# Altium PCB pcb_gr15.PcbDoc
Units mm, origin at the board's own origin, x right, y up, seen from the top; angles counter-clockwise.
Board outline 107.99 x 87.08 mm, 2 copper layers (Top Layer, Bottom Layer); 27 components, 17 nets, 63 pads, 0 vias.
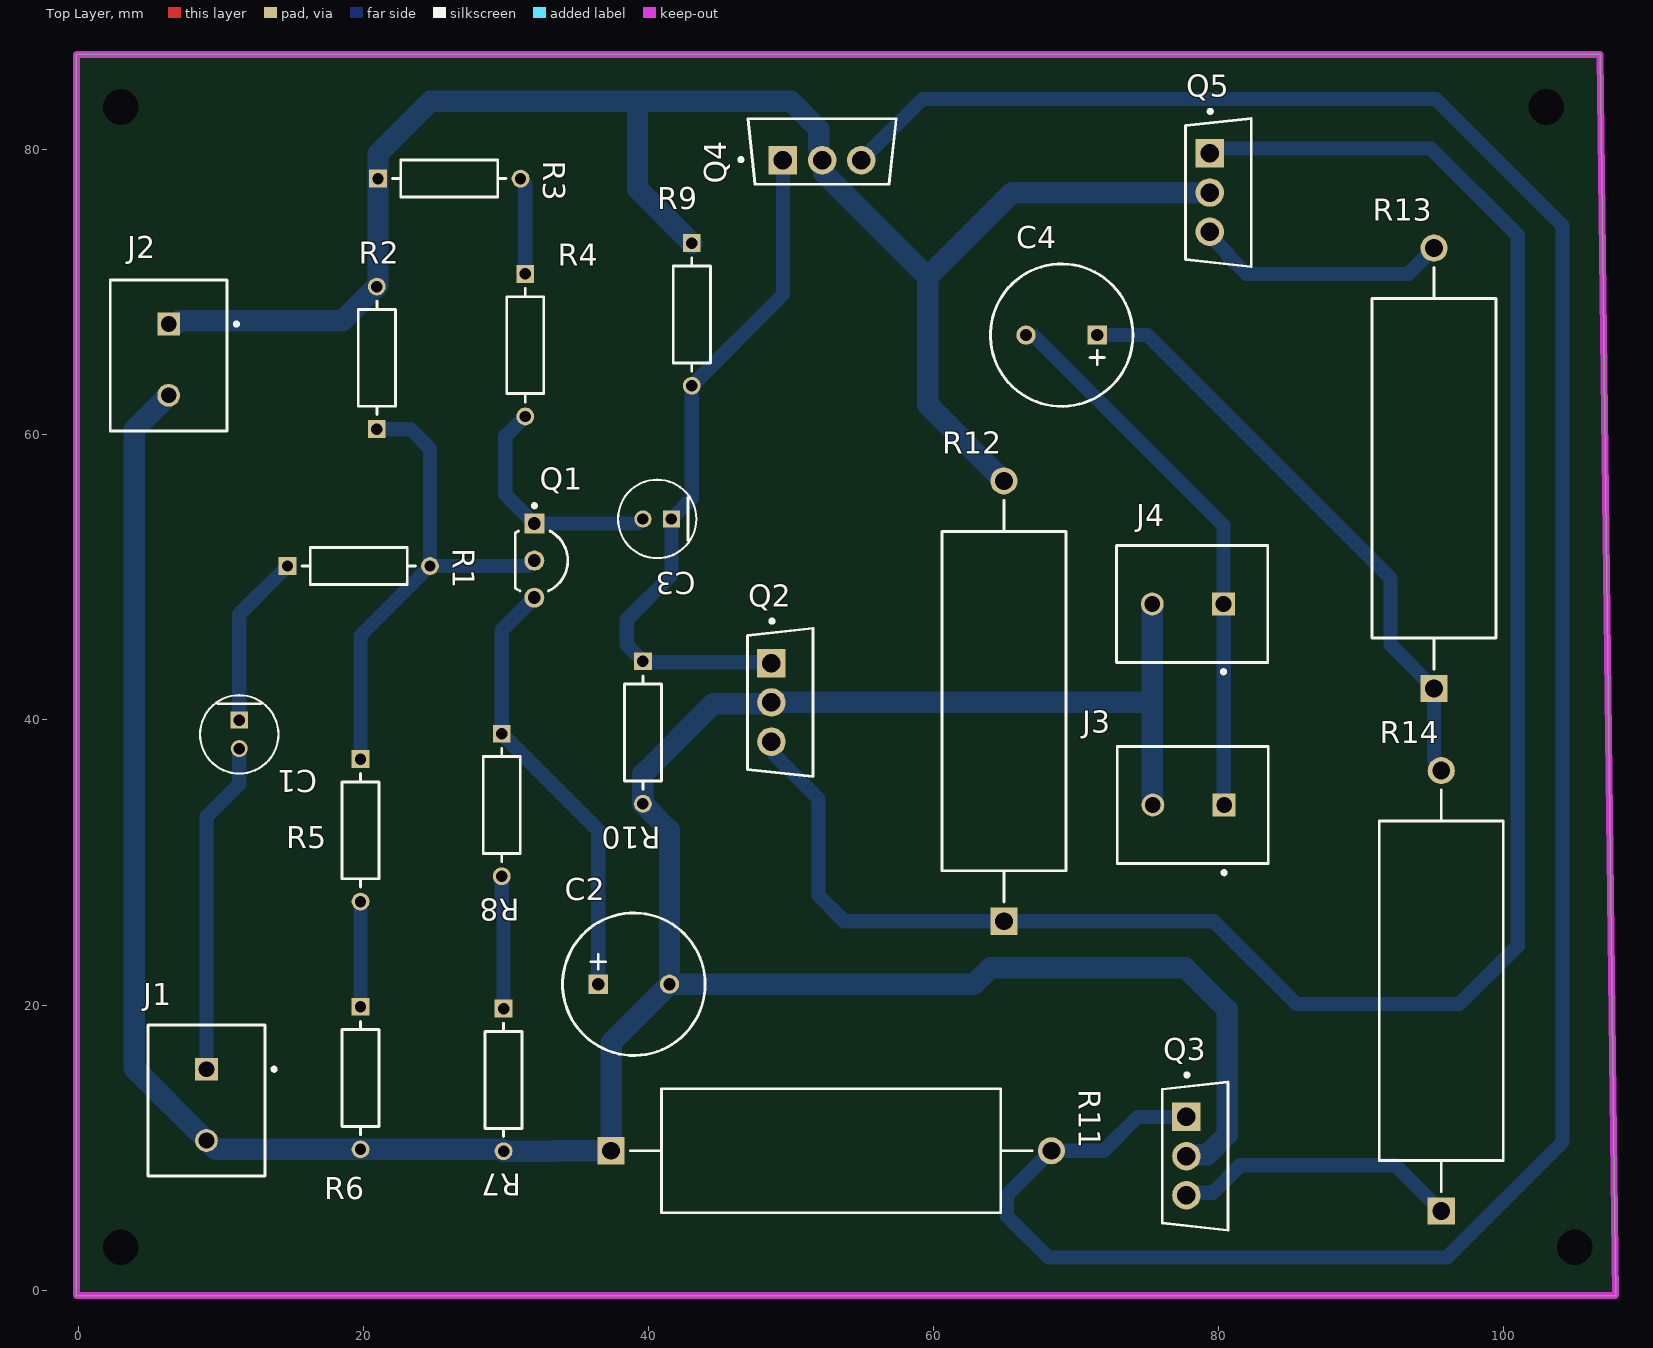
[diagram p0: Top Layer view]
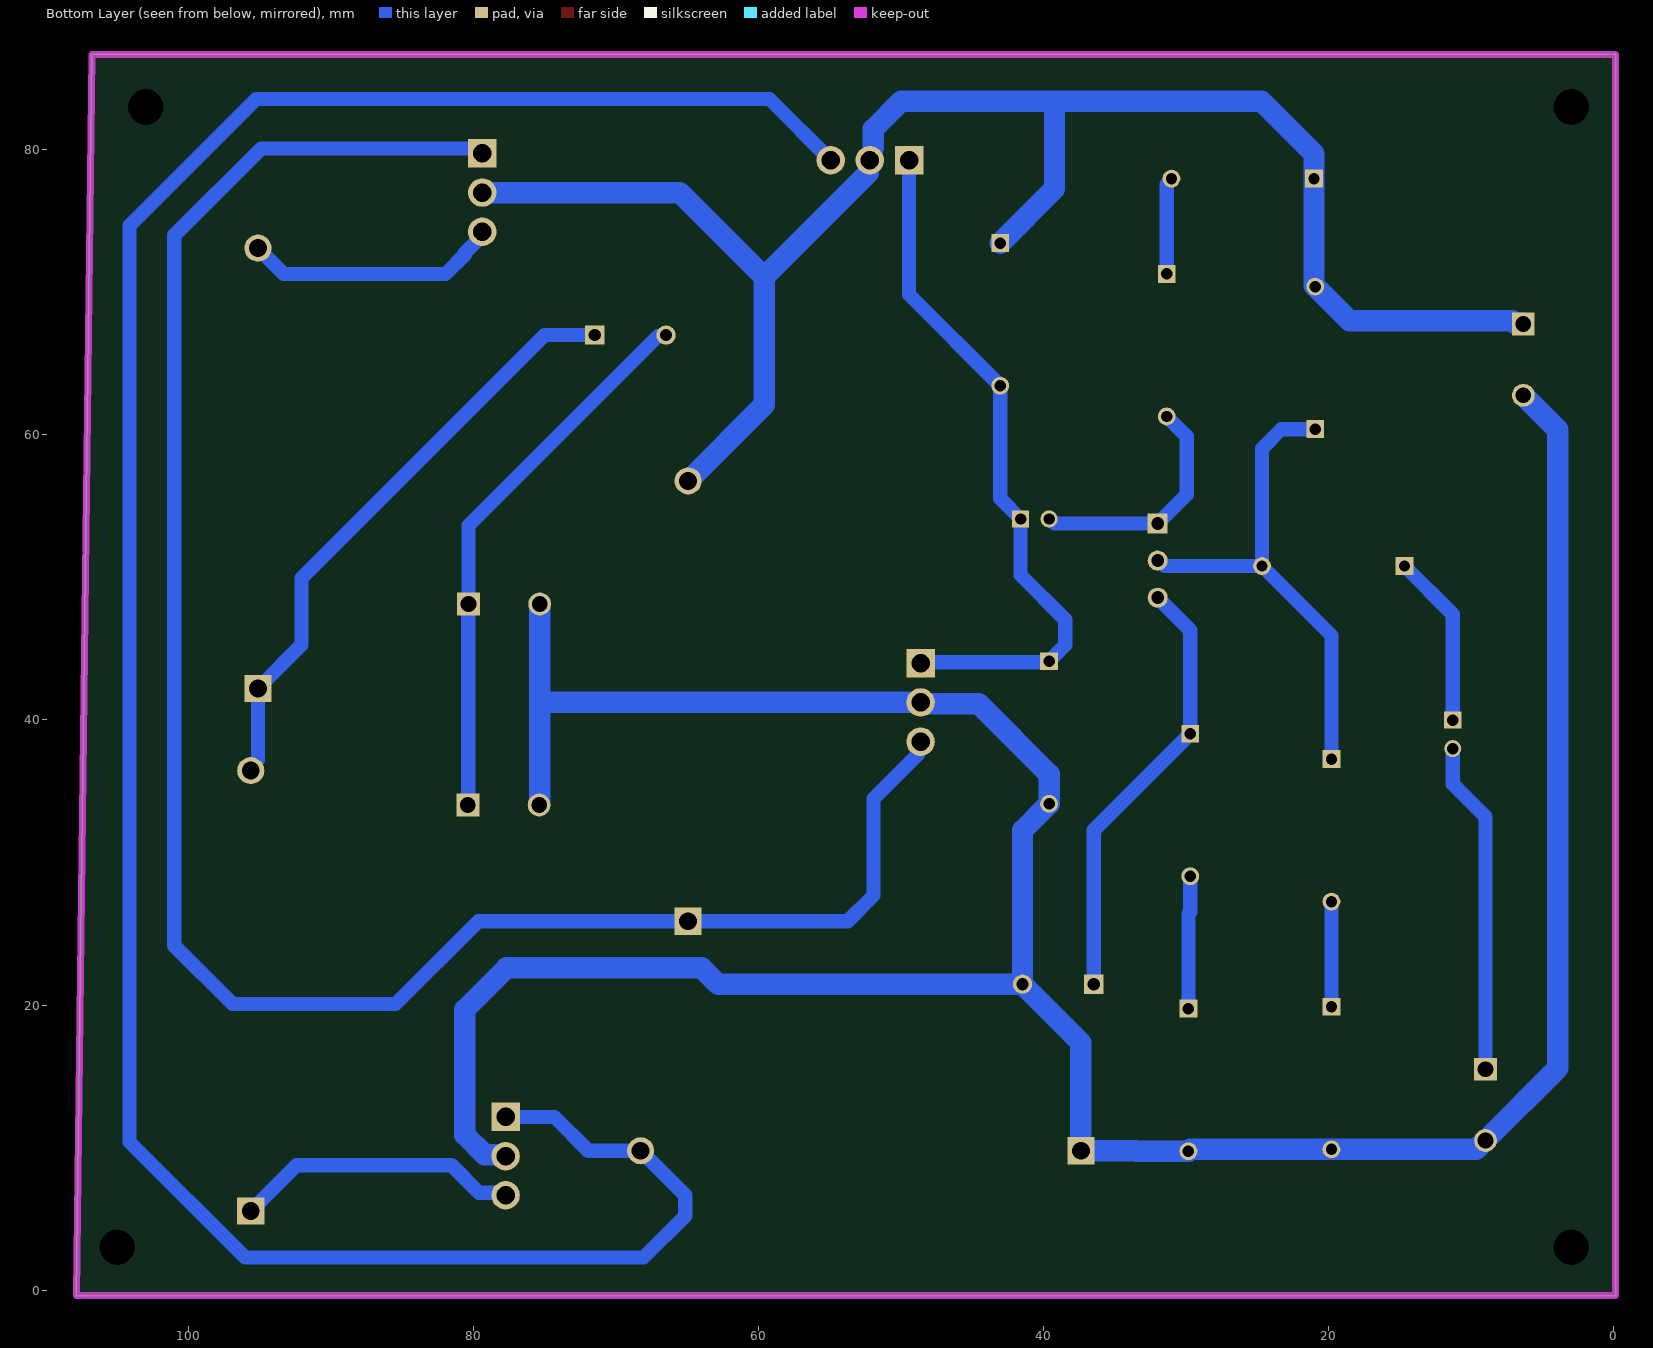
[diagram p1: Bottom Layer view, seen from below]
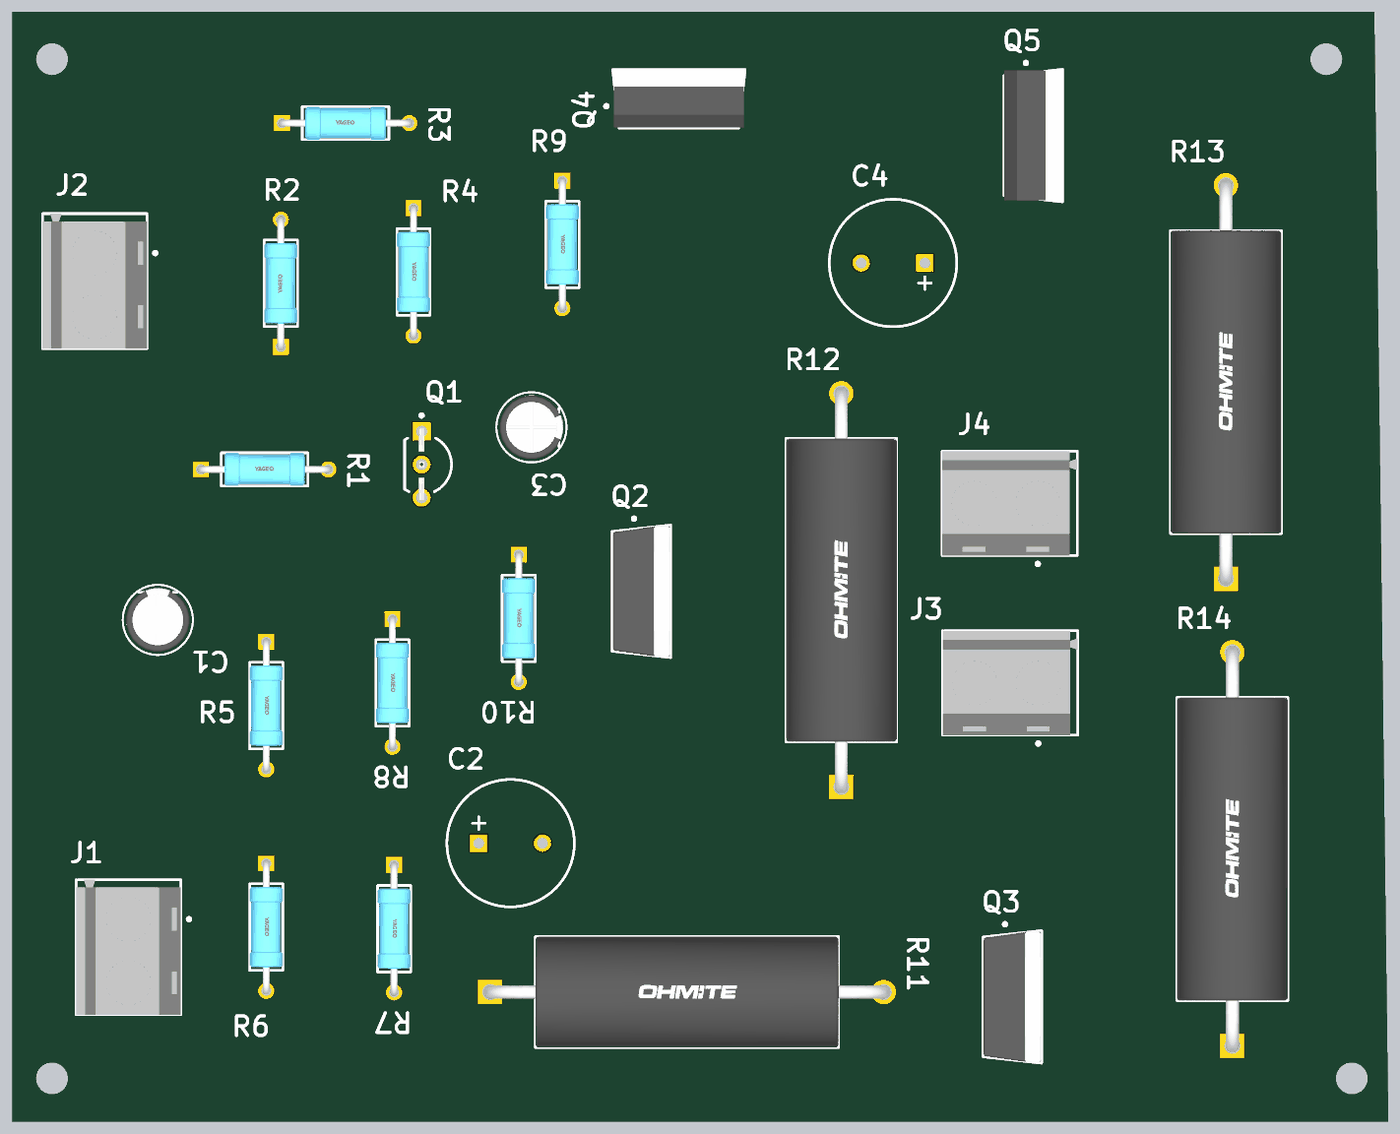
[diagram p2: 3D render of the assembled board from above, using the file's embedded part models]

## Layer stack, top to bottom
Top Solder: solder mask 0.0102, Solder Resist, Dk 3.5
Top Layer: signal copper 0.0356
Dielectric 1: dielectric 0.32, FR-4, Dk 4.8
Bottom Layer: signal copper 0.0356
Bottom Solder: solder mask 0.0102, Solder Resist, Dk 3.5

## Board outline
-0.127,-0.381 107.867,-0.381 106.773,86.699 -0.127,86.699

## Design rules (kind name [scope] priority, off if disabled: settings)
Clearance [All] p1: gap=0.75 ignorepadtopadclearanceinfootprint=FALSE
HoleSize [All] p1: absolutevalues=TRUE maxlimit=2.54 minlimit=0.8 maxpercent=80.000 minpercent=20.000
PolygonConnect [All] p1: connectstyle=Relief reliefconductorwidth=0.254 reliefentries=4 polygonreliefangle="90 Angle" airgapwidth=0.254
RoutingVias [All] p1: holewidth=0.711 width=1.27 viastyle="Through Hole" minholewidth=0.711 minwidth=1.27 maxholewidth=0.711 maxwidth=1.27
SolderMaskExpansion [All] p1: expansion=0.102 istentingtop=FALSE
Width Width_1 [InNet('+12V')or InNet('GND')] p1: maxlimit=3 minlimit=1.5 preferedwidth=1.5
Width [All] p2: maxlimit=3 minlimit=0.8 preferedwidth=1
29 further rules are at their usual default settings.

## Components (designator, comment, footprint, x,y, rotation, side; value= is the part's Value field where it differs from the comment)
C1 "EEUFM1H220_small" FP-RAD-TH-D_5_0_5-L_11_1-MFG 11.303,38.989 r270 top
C2 "PLF1A471MDO1_big" NIC-PLF-10x13-2_V 38.989,21.463 r0 top
C3 "EEUFM1H220_small" FP-RAD-TH-D_5_0_5-L_11_1-MFG 40.624,54.102 r180 top
C4 "PLF1A471MDO1_big" NIC-PLF-10x13-2_V 69,67 r180 top
J1 "Input" TECO-282836-2_V 9,13 r270 top
J2 "Power" TECO-282836-2_V 6.35,65.278 r270 top
J3 "Load" TECO-282836-2_V 77.898,34.036 r180 top
J4 "Output" TECO-282836-2_V 77.858,48.133 r180 top
Q1 "BC547BRL1G" ONSC-TO-92-3-29-11_AM_BL 32.004,51.181 r270 top
Q2 "TIP32C" FP-TO-220-P0A0015988-MFG 49.248,41.231 r0 top
Q3 "TIP32C" FP-TO-220-P0A0015988-MFG 78.359,9.398 r0 top
Q4 "TIP31C" FP-TO-220-P0A0015988-MFG 52.197,79.883 r90 top
Q5 "TIP31C" FP-TO-220-P0A0015988-MFG 80,77 r0 top
R1 "MFR-25FBF52-1K18" FP-MFR-25-MFG 19.685,50.8 r0 top value=2.2kΩ
R2 "MFR-25FBF52-1K18" FP-MFR-25-MFG 20.955,65.405 r90 top value=10kΩ
R3 "MFR-25FBF52-1K18" FP-MFR-25-MFG 26.035,77.978 r0 top value=120Ω
R4 "MFR-25FBF52-1K18" FP-MFR-25-MFG 31.369,66.294 r270 top value=120Ω
R5 "MFR-25FBF52-1K18" FP-MFR-25-MFG 19.812,32.258 r270 top value=1kΩ
R6 "MFR-25FBF52-1K18" FP-MFR-25-MFG 19.812,14.875 r270 top value=1kΩ
R7 "MFR-25FBF52-1K18" FP-MFR-25-MFG 29.845,14.748 r270 top value=33Ω
R8 "MFR-25FBF52-1K18" FP-MFR-25-MFG 29.718,34.036 r270 top value=33Ω
R9 "MFR-25FBF52-1K18" FP-MFR-25-MFG 43.053,68.453 r270 top value=1kΩ
R10 "MFR-25FBF52-1K18" FP-MFR-25-MFG 39.624,39.116 r270 top value=1kΩ
R11 "15FR010E" FP-15FR010E-MFG 52.832,9.779 r0 top
R12 "15FR010E" FP-15FR010E-MFG 64.944,41.325 r90 top
R13 "15FR010E" FP-15FR010E-MFG 95.123,57.658 r90 top
R14 "15FR010E" FP-15FR010E-MFG 95.631,21.005 r90 top

## Footprints (in the part's own frame and the unit in brackets; to place one, negate y for a bottom-side part, rotate by r counter-clockwise, add the part's x,y. Pads: shape width x height; smd on the part's side, far side on the other; paste and mask are expansions set on the pad)
FP-15FR010E-MFG [mm]
  rect 1.9x1.9 hole 1.25 paste-1000 mask+0: 1(-15.444,0)
  round 1.9 hole 1.25 paste-1000 mask+0: 2(15.444,0)
  silkscreen extent -14.09,-4.35 14.09,4.35, body extent -16.49,-4.45 16.49,4.45, height 0.25
FP-MFR-25-MFG [mm]
  rect 1.25x1.25 hole 0.8 paste-1000 mask+0: 1(-5,0)
  round 1.25 hole 0.8 paste-1000 mask+0: 2(5,0)
  silkscreen extent -3.98,-1.3 3.98,1.3, body extent -5.72,-1.4 5.72,1.4, height 0.25
FP-RAD-TH-D_5_0_5-L_11_1-MFG [mm]
  rect 1.2x1.2 hole 0.8 paste-1000 mask+0: 1(-1,0)
  round 1.2 hole 0.8 paste-1000 mask+0: 2(1,0)
  silkscreen extent -2.75,-2.75 2.75,2.75, body extent -2.85,-2.85 2.85,2.85, height 0.25
FP-TO-220-P0A0015988-MFG [mm]
  rect 2x2 hole 1.3 paste-1000 mask+0: 1(-0.607,2.75)
  round 2 hole 1.3 paste-1000 mask+0: 2(-0.607,0) 3(-0.607,-2.75)
  silkscreen extent -2.3,-5.2 2.3,5.82, body extent -2.4,-5.3 2.4,5.3, height 0.25
NIC-PLF-10x13-2_V [mm] "THD, 2-Leads, Dia 10mm, Body Length 12.5mm, Pin Spacing 5mm"
  rect 1.35x1.35 hole 0.85: 1(-2.5,0)
  round 1.35 hole 0.85: 2(2.5,0)
  silkscreen extent -5,-5 5,5, body extent -5,-5 5,5, height 13
ONSC-TO-92-3-29-11_AM_BL [mm] "TO, 3-Leads, Body Dia 4.7mm, Pitch 2.6mm"
  rect 1.4x1.4 hole 0.9: 1(-2.6,0)
  round 1.4 hole 0.9: 2(0,0) 3(2.6,0)
  silkscreen extent -3.97,-1.34 2.13,2.35, body extent -2.84,-1.34 2.84,2.35, height 5.33
TECO-282836-2_V [mm] "Female Header, Pitch 5mm, 1 x 2 Position, Height 10mm"
  rect 1.6x1.6 hole 1.1: 1(-2.5,0)
  round 1.6 hole 1.1: 2(2.5,0)
  silkscreen extent -5.6,-4.1 5,4.88, body extent -5.6,-4.1 5,4.1, height 10

## Part data
C1: library part CMP-05427-000661-1, "Aluminum Electrolytic Capacitors (Radial Lead Type) 22uF ±20% 50V", Capacitance=4.7uF, Case/Package=Radial, ESR (Equivalent Series Resistance)=340mR, Max Operating Temperature=105°C, Min Operating Temperature=-40°C, Package Quantity=200, Ripple Current=250mA, Tolerance=20%, Voltage=50V, Construction=RADIAL, Diameter=5mm, Dissipation Factor=0.1%, Height=11mm, Height - Seated (Max)=0.492inch, Impedance=340mR, Lead Diameter=0.5mm, Lead Free="Lead Free", Lead Pitch=2mm, Length=11mm, Life (Hours)=2000Hour, Mount="Through Hole", Number of Pins=2, Packaging=Bulk, Radiation Hardening=No, REACH SVHC="No SVHC", RoHS Compliant=Yes, Series=FM, Termination=Radial, Voltage Rating=50V, Voltage Rating (DC)=50V
C2 C4: library part CMP-1234-00001-1, "Aluminum Electrolytic Capacitor, 470 uF +/-20%, 10 V, -55 to 105 degC, 2-Pin THD, RoHS", Capacitance Tolerance=+/-20%, Leakage Current="0.94 mA", Manufacturer=Nichicon, PartNumber=PLF1A471MDO1, Rated Capacitance="1000 uF", Rated Voltage="10 V", Temperature Range="-55 to 105 degC", ComponentLink1Description="Manufacturer URL", ComponentLink1URL=http://www.nichicon.co.jp/, ComponentLink2Description=Datasheet, ComponentLink2URL=http://nichicon-us.com/english/products/pdfs/e-lf.pdf, ComponentLink3Description="Package Specification", ComponentLink3URL=http://nichicon-us.com/english/products/pdfs/e-lf.pdf, DatasheetVersion=Sep-13, Mounting Technology="Through Hole", PackageDescription="2-Pin Through Hole Device, Dia 10 mm, Body Length 13 mm, Pin Spacing 5 mm", Rated Ripple="5700 mA", RoHS=TRUE
C3: library part CMP-05427-000661-1, "Aluminum Electrolytic Capacitors (Radial Lead Type) 22uF ±20% 50V", Capacitance=100uF, Case/Package=Radial, ESR (Equivalent Series Resistance)=340mR, Max Operating Temperature=105°C, Min Operating Temperature=-40°C, Package Quantity=200, Ripple Current=250mA, Tolerance=20%, Voltage=50V, Construction=RADIAL, Diameter=5mm, Dissipation Factor=0.1%, Height=11mm, Height - Seated (Max)=0.492inch, Impedance=340mR, Lead Diameter=0.5mm, Lead Free="Lead Free", Lead Pitch=2mm, Length=11mm, Life (Hours)=2000Hour, Mount="Through Hole", Number of Pins=2, Packaging=Bulk, Radiation Hardening=No, REACH SVHC="No SVHC", RoHS Compliant=Yes, Series=FM, Termination=Radial, Voltage Rating=50V, Voltage Rating (DC)=50V
J1 J2 J3 J4: library part CMP-1684-00017-1, "Female Header, Pitch 5 mm, 1 x 2 Position, Height 10 mm, Tail Length 3.5 mm, Rohs, Bulk", Color=Green, Current=13.5A, Manufacturer="TE Connectivity", Package Description="Female Header, Pitch 5 mm, 1 x 2 Position, Height 10 mm, Tail Length 3.5 mm", Package Reference=THD, Standard Package=300, Voltage=300V, 3D Model=282836-2.pdf, Category=Connectors,Interconnects, Clamp Material - Plating=Brass-NickelPlated, Contact Material - Plating=Brass-TinPlated, Datasheet URL=http://www.te.com.cn/commerce/DocumentDelivery/DDEController?Action=showdoc&DocId=Catalog+Section%7F1308389_EUROSTYLE_TERMINAL_BLOCKS%7F0607%7Fpdf%7FEnglish%7FENG_CS_1308389_EUROSTYLE_TERMINAL_BLOCKS_0607.pdf%7F282836-2, Dynamic Catalog=BuchananSeries, Family=TerminalBlocks-WiretoBoard, Featured Product=EurostyleTerminalBlockConnectors, Features=Interlocking(Side), Housing Material=Polyamide(PA66),Nylon6/6, Manufacturer URL=http://www.te.com, Mating Orientation=HorizontalwithBoard, Mounting Type=ThroughHole, Number of Levels=1, Other Names="5ULV-02B / A98076", Packaging=Bulk, Pitch="0.197\"(5.00mm)", Positions Per Level=2, Product Training Modules=Wire-to-BoardEurostyleTerminalBlocks, RoHS Information=282836-2StatementofCompliance, Screw Material - Plating=Brass-NickelPlated, Screw Thread=M3, Series=Buchanan, Torque - Screw=0.68Nm(6Lb-In), Wire Gauge=16-30AWG, Wire Termination=Screw-RisingCageClamp
Q1: library part CMP-1048-01605-1, "Amplifier Transistor, NPN Silicon, 3-Pin TO-92, Pb-Free, Tape and Reel", Manufacturer="On Semiconductor", ComponentLink1Description="Manufacturer URL", ComponentLink1URL=http://www.onsemi.com/, ComponentLink2Description=Datasheet, ComponentLink2URL=http://www.onsemi.com/pub_link/Collateral/BC546-D.PDF, ComponentLink3Description="Package Specification", ComponentLink3URL=http://www.onsemi.com/pub_link/Collateral/MAC97-D.PDF, DatasheetVersion="Rev. 7", fT Min (MHz)=150, IC Continuous (A)=0.1, Mounting Technology="Through Hole", PackageDescription="3-Pin Transistor Outline, Body 4.825 x 3.685 mm, Pitch 1.27 mm", PackageReference=TO-92-3-29-11_AM_BL, PackageVersion="Rev. AM", Packing="Tape and Reel", PartNumber=BC547BRL1G, Polarity=NPN, RoHS=TRUE
Q2 Q3: library part CMP-12195-000005-1, "TRANS PNP 100V 3A TO-220", Collector Base Voltage=-100V, Collector Emitter Saturation Voltage=-1.2V, Emitter Base Voltage=-5V, Manufacturer=STMicroelectronics, Max Collector Current=-3A, Max Junction Temp=+150°C, Package=TO-220-P0A0015988, Power Dissipation=2W, Temperature="to +150°C", Automotive=No, Category=Trans, Collector Emitter Voltage=-100V, ComponentLink2Description=Datasheet, ComponentLink2URL=https://www.st.com/resource/en/datasheet/tip32c.pdf, Device Class L1="Discrete Semiconductors", Device Class L2=Transistors, Device Class L3=BJTs, Digikey Description="TRANS PNP 100V 3A TO-220", Height=19.68mm, Hfe Max=50, Hfe Min=10, Hfe Testic=-3A, Hfe Testvce=-4V, Lead Free=Yes, Manufacturer Part Number=TIP32C, Mouser Description="Original ST Microelectronics Transistor, 100V, 3A, .22 Ohm, TO-220 Package", Number Of Elements=1, Number Of Pnp=1, Octopart=https://octopart.com/tip32c-stmicroelectronics-353617, RoHS=TRUE, Standoff Height=3.5mm, Temperature Range High=+150°C
Q4 Q5: library part CMP-12195-000001-1, "TRANS NPN 100V 3A TO-220", Collector Base Voltage=100V, Collector Emitter Saturation Voltage=1.2V, Emitter Base Voltage=5V, Manufacturer=STMicroelectronics, Max Collector Current=3A, Max Junction Temp=+150°C, Package=TO-220-P0A0015988, Power Dissipation=2W, Temperature="to +150°C", Automotive=No, Category=Trans, Collector Emitter Voltage=100V, ComponentLink2Description=Datasheet, ComponentLink2URL=https://www.st.com/resource/en/datasheet/tip31c.pdf, Device Class L1="Discrete Semiconductors", Device Class L2=Transistors, Device Class L3=BJTs, Digikey Description="TRANS NPN 100V 3A TO-220", Height=19.68mm, Hfe Max=50, Hfe Min=10, Hfe Testic=3A, Hfe Testvce=4V, Lead Free=Yes, Manufacturer Part Number=TIP31C, Mouser Description="Bipolar Transistors - BJT NPN Gen Pur Power", Number Of Elements=1, Number Of Npn=1, Octopart=https://octopart.com/tip31c-stmicroelectronics-15555, RoHS=TRUE, Standoff Height=3.5mm, Temperature Range High=+150°C
R1: library part CMP-03413-000001-1, "RES 1.18K OHM 1/4W 1% AXIAL", Manufacturer=Yageo, Package=MFR-25, Power Rating=0.25W, Resistance=2.2kΩ, Temperature="-55°C to +155°C", Temperature Coefficient=100ppm/°C, Temperature Range High=+155°C, Temperature Range Low=-55°C, Tolerance=1%, Voltage Rating=250V, Automotive=No, Category=Res, ComponentLink2Description=Datasheet, ComponentLink2URL=https://www.yageo.com/upload/media/product/products/datasheet/lr/Yageo_LR_MFR_1.pdf, Composition="Metal Film", Device Class L1="Passive Components", Device Class L2=Resistors, Device Class L3="Through-Hole Resistors", Digikey Description="RES 1.18K OHM 1/4W 1% AXIAL", Height=2.6mm, Ipc Land Pattern Name=RESAD1000W75L680D260, Lead Free=Yes, Manufacturer Part Number=MFR-25FBF52-1K18, Mouser Description="Metal Film Resistors 1.18K OHM 1/4W 1%", Octopart=https://octopart.com/mfr-25fbf52-1k18-yageo-56251681, RoHS=TRUE, Series=MFR
R2: library part CMP-03413-000001-1, "RES 1.18K OHM 1/4W 1% AXIAL", Manufacturer=Yageo, Package=MFR-25, Power Rating=0.25W, Resistance=10kΩ, Temperature="-55°C to +155°C", Temperature Coefficient=100ppm/°C, Temperature Range High=+155°C, Temperature Range Low=-55°C, Tolerance=1%, Voltage Rating=250V, Automotive=No, Category=Res, ComponentLink2Description=Datasheet, ComponentLink2URL=https://www.yageo.com/upload/media/product/products/datasheet/lr/Yageo_LR_MFR_1.pdf, Composition="Metal Film", Device Class L1="Passive Components", Device Class L2=Resistors, Device Class L3="Through-Hole Resistors", Digikey Description="RES 1.18K OHM 1/4W 1% AXIAL", Height=2.6mm, Ipc Land Pattern Name=RESAD1000W75L680D260, Lead Free=Yes, Manufacturer Part Number=MFR-25FBF52-1K18, Mouser Description="Metal Film Resistors 1.18K OHM 1/4W 1%", Octopart=https://octopart.com/mfr-25fbf52-1k18-yageo-56251681, RoHS=TRUE, Series=MFR
R3 R4: library part CMP-03413-000001-1, "RES 1.18K OHM 1/4W 1% AXIAL", Manufacturer=Yageo, Package=MFR-25, Power Rating=0.25W, Resistance=120Ω, Temperature="-55°C to +155°C", Temperature Coefficient=100ppm/°C, Temperature Range High=+155°C, Temperature Range Low=-55°C, Tolerance=1%, Voltage Rating=250V, Automotive=No, Category=Res, ComponentLink2Description=Datasheet, ComponentLink2URL=https://www.yageo.com/upload/media/product/products/datasheet/lr/Yageo_LR_MFR_1.pdf, Composition="Metal Film", Device Class L1="Passive Components", Device Class L2=Resistors, Device Class L3="Through-Hole Resistors", Digikey Description="RES 1.18K OHM 1/4W 1% AXIAL", Height=2.6mm, Ipc Land Pattern Name=RESAD1000W75L680D260, Lead Free=Yes, Manufacturer Part Number=MFR-25FBF52-1K18, Mouser Description="Metal Film Resistors 1.18K OHM 1/4W 1%", Octopart=https://octopart.com/mfr-25fbf52-1k18-yageo-56251681, RoHS=TRUE, Series=MFR
R5 R6 R9 R10: library part CMP-03413-000001-1, "RES 1.18K OHM 1/4W 1% AXIAL", Manufacturer=Yageo, Package=MFR-25, Power Rating=0.25W, Resistance=1kΩ, Temperature="-55°C to +155°C", Temperature Coefficient=100ppm/°C, Temperature Range High=+155°C, Temperature Range Low=-55°C, Tolerance=1%, Voltage Rating=250V, Automotive=No, Category=Res, ComponentLink2Description=Datasheet, ComponentLink2URL=https://www.yageo.com/upload/media/product/products/datasheet/lr/Yageo_LR_MFR_1.pdf, Composition="Metal Film", Device Class L1="Passive Components", Device Class L2=Resistors, Device Class L3="Through-Hole Resistors", Digikey Description="RES 1.18K OHM 1/4W 1% AXIAL", Height=2.6mm, Ipc Land Pattern Name=RESAD1000W75L680D260, Lead Free=Yes, Manufacturer Part Number=MFR-25FBF52-1K18, Mouser Description="Metal Film Resistors 1.18K OHM 1/4W 1%", Octopart=https://octopart.com/mfr-25fbf52-1k18-yageo-56251681, RoHS=TRUE, Series=MFR
R7 R8: library part CMP-03413-000001-1, "RES 1.18K OHM 1/4W 1% AXIAL", Manufacturer=Yageo, Package=MFR-25, Power Rating=0.25W, Resistance=33Ω, Temperature="-55°C to +155°C", Temperature Coefficient=100ppm/°C, Temperature Range High=+155°C, Temperature Range Low=-55°C, Tolerance=1%, Voltage Rating=250V, Automotive=No, Category=Res, ComponentLink2Description=Datasheet, ComponentLink2URL=https://www.yageo.com/upload/media/product/products/datasheet/lr/Yageo_LR_MFR_1.pdf, Composition="Metal Film", Device Class L1="Passive Components", Device Class L2=Resistors, Device Class L3="Through-Hole Resistors", Digikey Description="RES 1.18K OHM 1/4W 1% AXIAL", Height=2.6mm, Ipc Land Pattern Name=RESAD1000W75L680D260, Lead Free=Yes, Manufacturer Part Number=MFR-25FBF52-1K18, Mouser Description="Metal Film Resistors 1.18K OHM 1/4W 1%", Octopart=https://octopart.com/mfr-25fbf52-1k18-yageo-56251681, RoHS=TRUE, Series=MFR
R11 R12: library part CMP-33362-000004-1, "RES 0.01 OHM 5W 1% AXIAL", Case/Package=Axial, Max Operating Temperature=275°C, Max Power Dissipation=5W, Min Operating Temperature=-55°C, Package Quantity=10, Resistance=56Ω, Resistor Type="Metal Element", Temperature Coefficient=100ppm/°C, Tolerance=1%, Voltage Rating=100mV, Voltage Rating (AC)=220mV, Voltage Rating (DC)=1kV, Diameter=8.4mm, Lead Diameter=0.05mm, Lead Free="Lead Free", Lead Length=39.7mm, Length=23.8mm, Mount="Through Hole", Number of Terminations=2, Packaging=Bulk, Power Rating=5W, RoHS Compliant=Yes, Termination=Axial
R13 R14: library part CMP-33362-000004-1, "RES 0.01 OHM 5W 1% AXIAL", Case/Package=Axial, Max Operating Temperature=275°C, Max Power Dissipation=5W, Min Operating Temperature=-55°C, Package Quantity=10, Resistance=2.2Ω, Resistor Type="Metal Element", Temperature Coefficient=100ppm/°C, Tolerance=1%, Voltage Rating=100mV, Voltage Rating (AC)=220mV, Voltage Rating (DC)=1kV, Diameter=8.4mm, Lead Diameter=0.05mm, Lead Free="Lead Free", Lead Length=39.7mm, Length=23.8mm, Mount="Through Hole", Number of Terminations=2, Packaging=Bulk, Power Rating=5W, RoHS Compliant=Yes, Termination=Axial

## Free pads (board coordinates)
  round 0 hole 2.5 unplated: 19(3,83) 20(103,83) 21(105,3) 22(3,3)

## Nets (pads, with @x,y where several pads share a name; then routed paths per layer and width w, separated by ;. In a path a pad name is that pad's centre, name@x,y a point inside that pad or via, vN(x,y) a via of type N, cw(c..) or ccw(c..) an arc to the next point about the centre after c; other vN are vias at no path point)
+12V: J2.1 Q4.2 Q5.2 R2.2 R3.1 R9.1 R12.2 | length 121
  Bottom Layer w1.5: J2.1 6.4,67.828 6.939,67.828 7.111,68 18.55,68 R2.2 21.035,70.485 R3.1 21.035,79.718 24.722,83.405 39.243,83.405 ; R9.1 39.243,77.263 39.243,83.405 ; Q4.2@51.947,80.137 51.947,81.462 50.004,83.405 39.243,83.405 ; Q4.2@52.293,79.18 52.293,78.394 59.607,71.08 ; R12.2 59.607,62.106 59.607,71.08 ; Q5.2 65.527,77 59.607,71.08
GND: C2.2 J1.2 J2.2 J3.2 J4.2 Q2.2 Q3.2 R6.2 R7.2 R10.2 R11.1 | length 218
  Bottom Layer w1.5: J2.2 3.937,60.365 3.937,15.563 J1.2 9.027,10.5 9.652,9.875 29.718,9.875 R7.2 33.501,9.748 33.532,9.779 R11.1 37.388,17.362 C2.2 ; J4.2 75.358,41.231 ; J3.2 75.398,34.063 75.358,34.103 75.358,41.231 ; Q3.2 77.847,9.494 79.218,9.494 80.605,10.88 80.605,19.686 77.685,22.606 63.988,22.606 62.845,21.463 C2.2 ; C2.2 41.489,32.251 R10.2 39.624,36.195 44.564,41.135 48.545,41.135 Q2.2 75.358,41.231
NetC1_1: C1.1 R1.1 | length 12.2
  Bottom Layer w1: C1.1 11.303,47.418 R1.1
NetC1_2: C1.2 J1.1 | length 23.4
  Bottom Layer w1: J1.1 9,33.212 11.303,35.515 C1.2
NetC2_1: C2.1 Q1.3 R8.1 | length 30.9
  Bottom Layer w1: Q1.3 29.718,46.295 R8.1 36.489,32.265 C2.1
NetC3_1: C3.1 Q2.1 Q4.1 R9.2 R10.1 | length 49.2
  Bottom Layer w1: Q2.1 48.573,44.048 39.692,44.048 38.481,45.259 38.481,47.028 41.624,50.171 C3.1 43.053,55.531 R9.2 49.447,69.847 Q4.1
NetC3_2: C3.2 Q1.1 R4.2 | length 16.7
  Bottom Layer w1: R4.2 29.972,59.897 29.972,55.813 Q1.1 39.249,53.781 39.57,54.102 C3.2
NetC4_1: C4.1 R13.1 R14.2 | length 42.6
  Bottom Layer w1: C4.1 75,67 92.064,49.936 92.064,45.273 R13.1 95.123,37.201 95.631,36.693 R14.2
NetC4_2: C4.2 J3.1 J4.1 | length 39
  Bottom Layer w1: C4.2 66.567,66.933 67.067,66.933 80.358,53.642 J4.1 80.378,48.113 80.378,34.056 J3.1
NetQ1_2: Q1.2 R1.2 R2.1 R5.1 | length 35.6
  Bottom Layer w1: R5.1 19.812,45.927 R1.2 ; R2.1 23.309,60.405 24.685,59.029 R1.2 ; Q1.2 31.896,51.181 31.515,50.8 R1.2
NetQ2_3: Q2.3 Q5.1 R12.1 | length 140.2
  Bottom Layer w1: Q2.3 48.832,38.29 48.832,37.585 51.943,34.474 51.943,27.686 53.748,25.881 R12.1 79.656,25.881 85.471,20.066 96.901,20.066 101,24.165 101,74 94.899,80.101 79.744,80.101 Q5.1
NetQ3_1: Q3.1 Q4.3 R11.2 | length 178.8
  Bottom Layer w1: Q4.3 59.237,83.566 95.25,83.566 104.14,74.676 104.14,10.402 96.024,2.286 68.072,2.286 65.151,5.207 65.151,6.654 R11.2 71.951,9.779 74.32,12.148 Q3.1
NetQ3_3: Q3.3 R14.1 | length 20.1
  Bottom Layer w1: Q3.3 77.943,6.839 79.61,6.839 81.534,8.763 92.429,8.763 R14.1
NetQ5_3: Q5.3 R13.2 | length 17.9
  Bottom Layer w1: Q5.3 79.393,73.979 80.615,72.756 80.615,72.645 81.969,71.291 93.312,71.291 R13.2
NetR3_2: R3.2 R4.1 | length 6.8
  Bottom Layer w1: R3.2 31.035,77.91 31.369,77.576 R4.1
NetR5_2: R5.2 R6.1 | length 7.4
  Bottom Layer w1: R6.1 R5.2
NetR7_1: R7.1 R8.2 | length 9.3
  Bottom Layer w1: R8.2 29.718,26.53 29.845,26.403 R7.1

## Keep-outs
Keep-Out Layer:
  the board outline again, w0.5